# Altium PCB AutoReverseAVR.PcbDoc
Units mm, origin at the board's own origin, x right, y up, seen from the top; angles counter-clockwise.
Board outline 152.4 x 101.6 mm, 2 copper layers (Top Layer, Bottom Layer); 53 components, 50 nets, 179 pads, 39 vias.
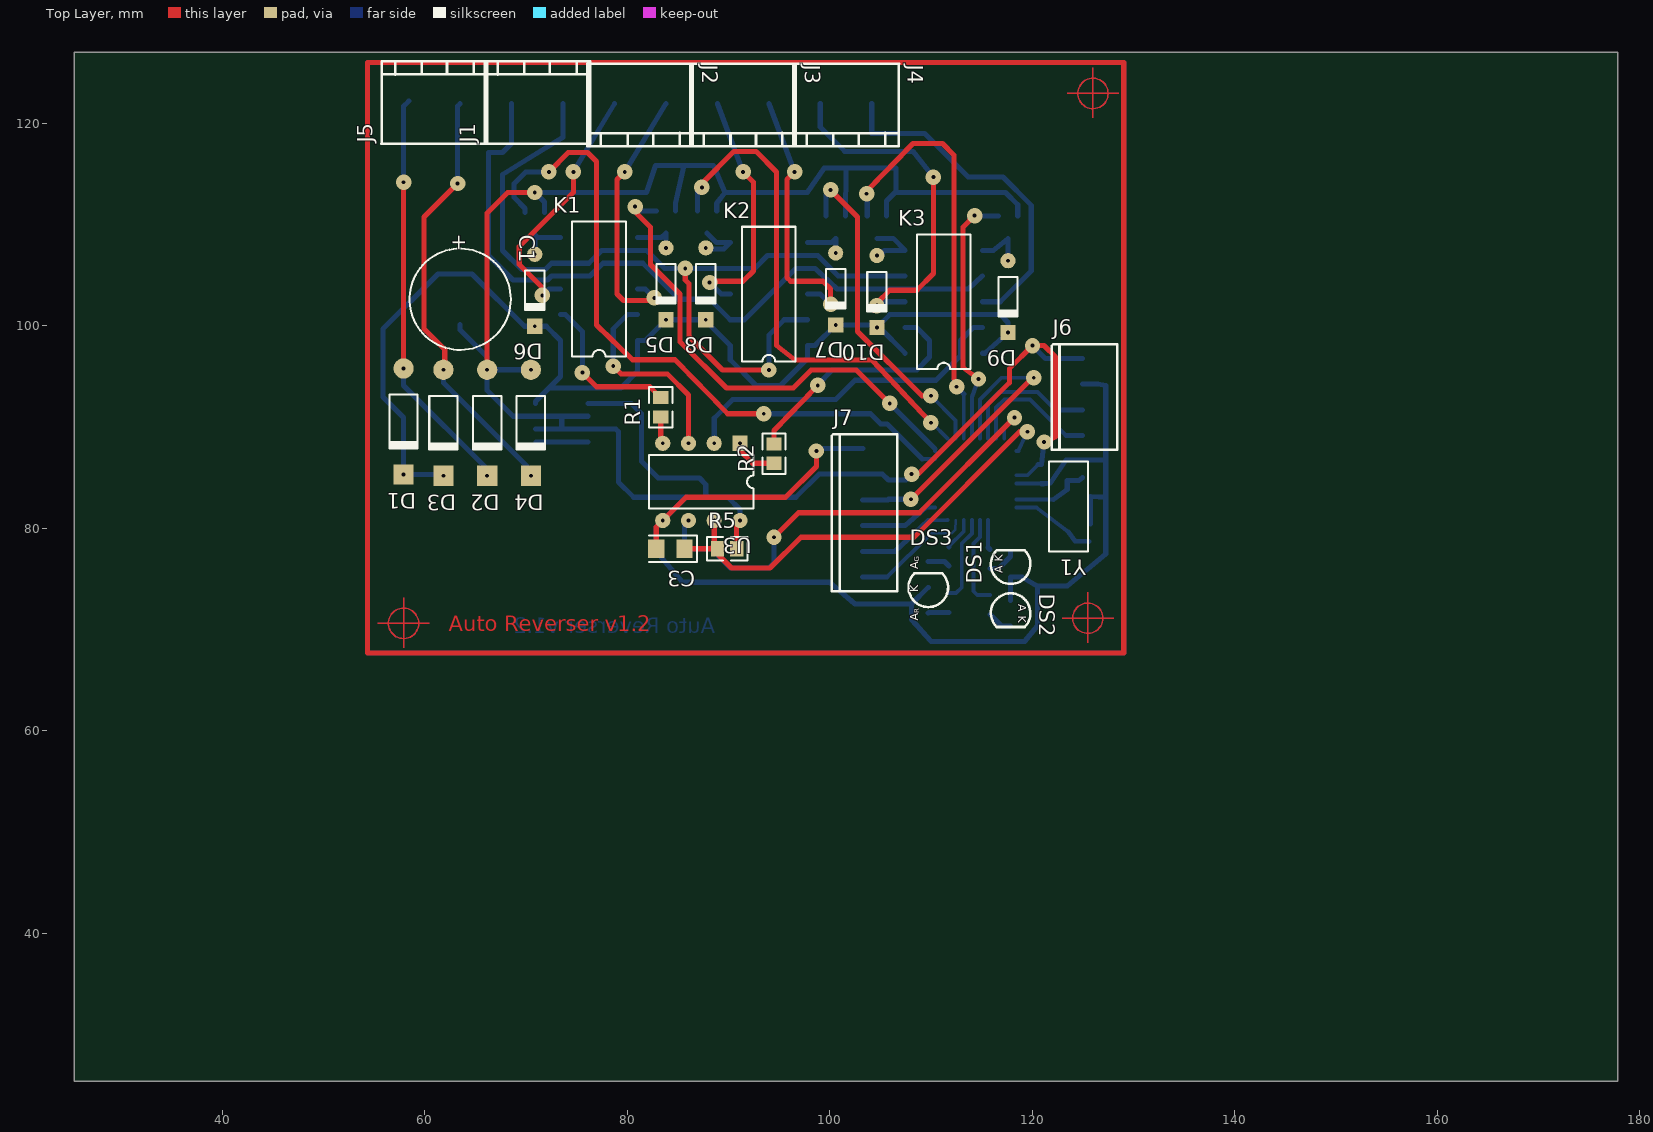
[diagram p0: Top Layer view]
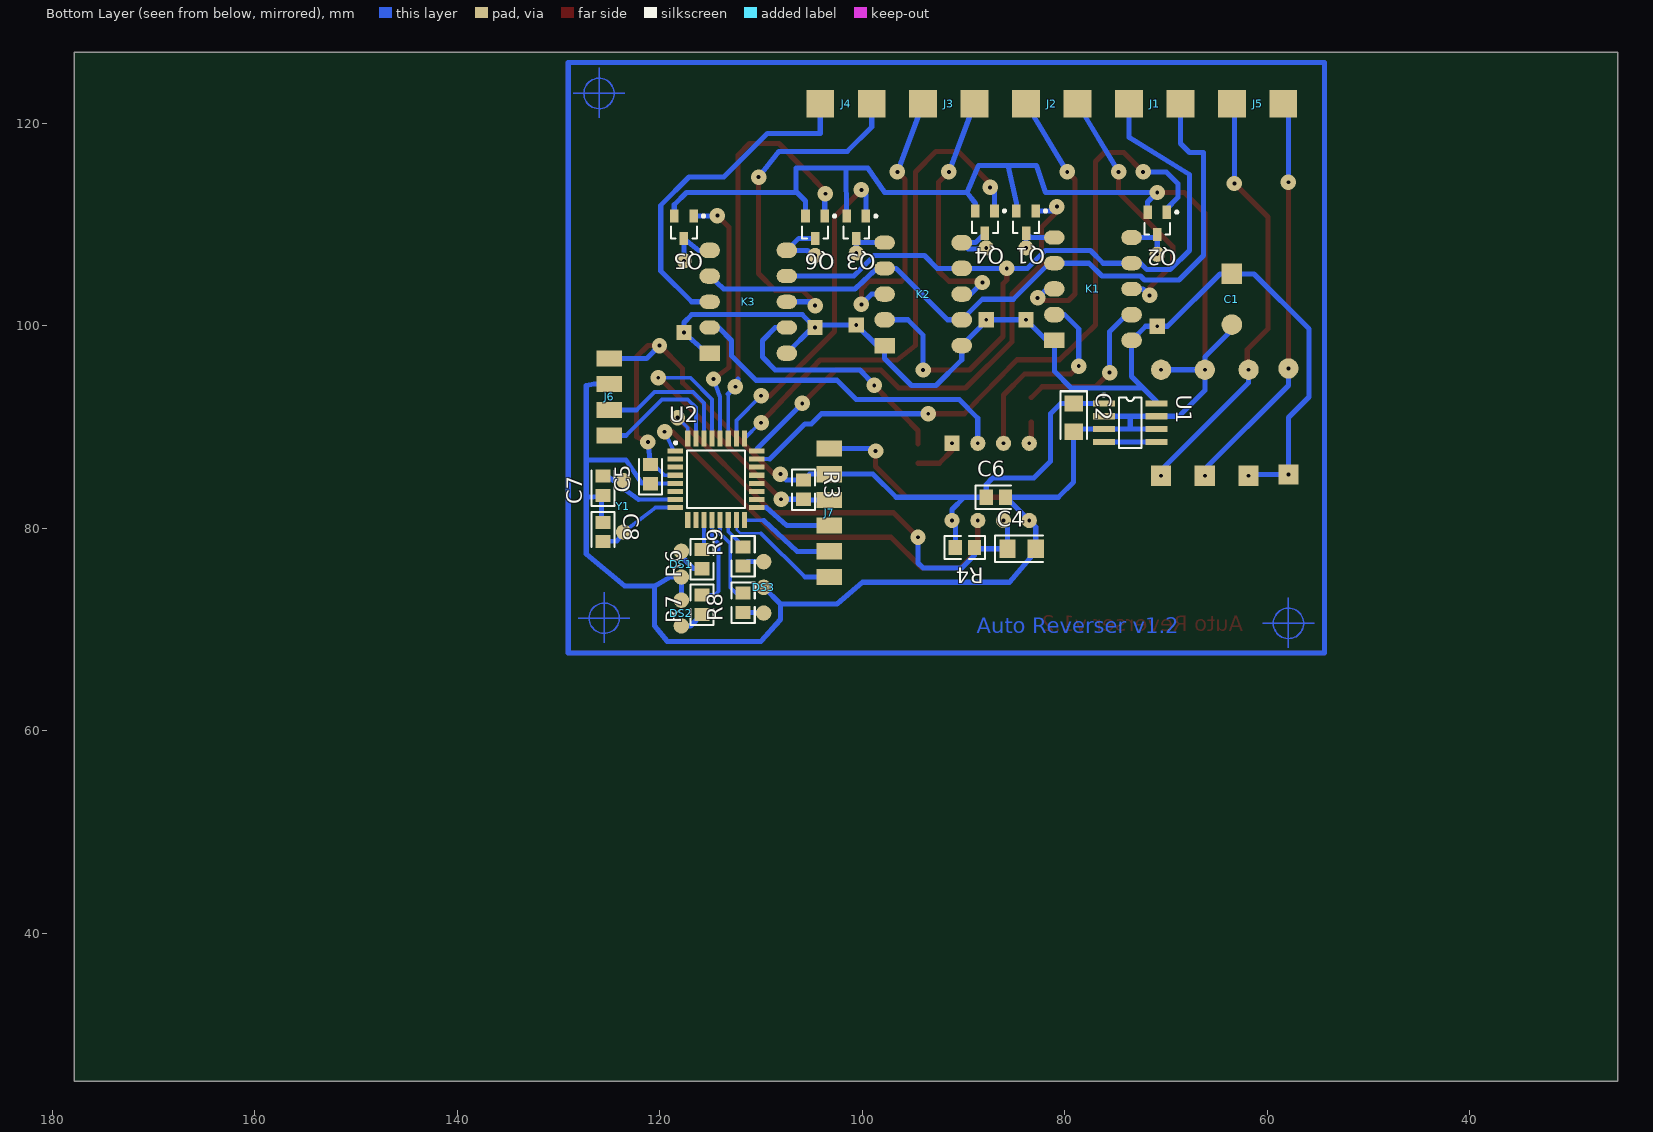
[diagram p1: Bottom Layer view, seen from below]

## Layer stack, top to bottom
Top Layer: signal copper 0.0356
Dielectric: dielectric 0.32, FR-4, Dk 4.8
Bottom Layer: signal copper 0.0356

## Board outline
25.4,25.4 177.8,25.4 177.8,127 25.4,127

## Design rules (kind name [scope] priority, off if disabled: settings)
Clearance [All] p1: gap=0.305
ComponentClearance [All] p1: gap=0.254 collisioncheckmode=1
PolygonConnect [All] p1: connectstyle=Relief reliefconductorwidth=0.254 reliefentries=4 polygonreliefangle="90 Angle"
RoutingLayers [All] p1: top layer=Horizontal bottom layer=Vertical
RoutingVias [All] p1: holewidth=0.381 width=1.524 viastyle="Through Hole" minholewidth=0.381 minwidth=1.524 maxholewidth=0.381 maxwidth=1.524
SolderMaskExpansion [All] p1: expansion=0.102
TestPointUsage [All] p1: valid=0 allowmultiple=FALSE
Testpoint [All] p1: side=15 testpointundercomponent=TRUE minsize=1.016 maxsize=2.54 preferedsize=1.524 minholesize=0 maxholesize=1.016 preferedholesize=0.813 testpointgrid=0.025 style=1023 order=1234567890
Width [All] p1: maxlimit=1.27 minlimit=0.254 preferedwidth=0.254
16 further rules are at their usual default settings.

## Classes and differential pairs
component class AutoReverseAVR: C1 C2 C3 C4 C5 C6 C7 C8 D1 D2 D3 D4 D5 D6 D7 D8 D9 D10 DS1 DS2 DS3 J1 J2 J3 J4 J5 J6 J7 K1 K2 K3 Q1 Q2 Q3 Q4 Q5 Q6 R1 R2 R3 R4 R5 R6 R7 R8 R9 U1 U2 U3 Y1

## Components (designator, comment, footprint, x,y, rotation, side; value= is the part's Value field where it differs from the comment)
C1 "Cap Pol1" CAPPR5-10X10.5 63.5,102.616 r270 top
C2 "10v" CC3216-1206 79.121,90.932 r270 bottom
C3 "Cap Pol1" CC3216-1206 84.267,77.978 r180 top
C4 "Cap Pol1" CC3216-1206 84.267,77.978 r180 bottom
C5 "Cap" CC2012-0805 120.904,85.344 r90 bottom
C6 "Cap" CC2012-0805 86.807,83.058 r180 bottom
C7 "Cap" CC2012-0805 125.603,84.201 r90 bottom
C8 "Cap" CC2012-0805 125.603,79.629 r270 bottom
D1 "Diode 1N4004" DIO10.46-5.3x2.8 57.912,90.551 r270 top
D2 "Diode 1N4004" DIO10.46-5.3x2.8 66.167,90.424 r270 top
D3 "Diode 1N4004" DIO10.46-5.3x2.8 61.849,90.424 r270 top
D4 "Diode 1N4004" DIO10.46-5.3x2.8 70.485,90.424 r270 top
D5 "Diode 1N4148" DIO7.1-3.9x1.9 83.82,104.14 r270 top
D6 "Diode 1N4148" DIO7.1-3.9x1.9 70.866,103.505 r270 top
D7 "Diode 1N4148" DIO7.1-3.9x1.9 100.584,103.632 r270 top
D8 "Diode 1N4148" DIO7.1-3.9x1.9 87.757,104.14 r270 top
D9 "Diode 1N4148" DIO7.1-3.9x1.9 117.602,102.87 r270 top
D10 "Diode 1N4148" DIO7.1-3.9x1.9 104.648,103.378 r270 top
DS1 "LED0" LED3mm 117.856,75.184 r90 top
DS2 "LED0" LED3mm 117.856,72.898 r270 top
DS3 "LED Tricolour" "LED3mm TriColour" 109.728,74.168 r90 top
J1 "Main Track" "Screw Terminal 2 way 0.2" 76.2,124.46 r90 top
J2 "West" "Screw Terminal 2 way 0.2" 76.2,119.38 r270 top
J3 "Center" "Screw Terminal 2 way 0.2" 86.36,119.38 r270 top
J4 "East" "Screw Terminal 2 way 0.2" 96.52,119.38 r270 top
J5 "12V AC" "Screw Terminal 2 way 0.2" 66.04,124.46 r90 top
J6 "RS232 CONNECTOR" "0.1 SIP 4 PIN" 127.508,91.694 r0 top
J7 "ISP Connector" "0.1 SIP 6 PIN" 105.791,82.804 r0 top
K1 "West Relay" DIP-10#1 77.216,103.632 r90 top
K2 "Reversing Relay" DIP-10#2 93.98,103.124 r90 top
K3 "East Relay" DIP-10#3 111.252,102.362 r90 top
Q1 "UN2212" SO-G3 83.82,110.236 r0 bottom
Q2 "UN2212" SO-G3 70.866,110.109 r0 bottom
Q3 "UN2212" SO-G3 100.584,109.728 r0 bottom
Q4 "UN2212" SO-G3 87.884,110.236 r0 bottom
Q5 "UN2212" SO-G3 117.602,109.728 r0 bottom
Q6 "UN2212" SO-G3 104.648,109.728 r0 bottom
R1 "Res2" CR2012-0805 83.312,91.948 r90 top
R2 "Res2" CR2012-0805 94.488,87.376 r90 top
R3 "Res2" CR2012-0805 105.791,83.82 r270 bottom
R4 "Res2" CR2012-0805 89.855,78.105 r0 bottom
R5 "Res2" CR2012-0805 89.855,77.978 r0 top
R6 "Res2" CR2012-0805 115.824,76.962 r90 bottom
R7 "Res2" CR2012-0805 115.824,72.451 r90 bottom
R8 "Res2" CR2012-0805 111.76,72.644 r90 bottom
R9 "Res2" CR2012-0805 111.76,77.216 r90 bottom
U1 "LM78L05ACM" M08A 73.533,90.424 r270 bottom
U2 "AT90LS4433-4AC" 32A 114.427,84.836 r180 bottom
U3 "HCPL-2530 Opto Coupler" 8P3 87.315,84.582 r180 top
Y1 "8MHz" RAD-0.2 123.571,82.169 r270 top
? "" Crosshair 57.912,70.612 r270 top
? "" Crosshair 125.476,71.12 r270 top
? "" Crosshair 125.984,122.936 r270 top

## Footprints (in the part's own frame and the unit in brackets; to place one, negate y for a bottom-side part, rotate by r counter-clockwise, add the part's x,y. Pads: shape width x height; smd on the part's side, far side on the other; paste and mask are expansions set on the pad)
"0.1 SIP 4 PIN" [mm] "0.1 SIP 4 PIN"
  rect 2.5x1.6 smd far side: 1(-2.54,5.08) 2(-2.54,2.54) 3(-2.54,0) 4(-2.54,-2.54)
  silkscreen extent -5.59,-3.94 0.89,6.48
"0.1 SIP 6 PIN" [mm] "0.1 SIP 6 PIN"
  rect 2.5x1.6 smd far side: 1(-2.54,5.08) 2(-2.54,2.54) 3(-2.54,0) 4(-2.54,-2.54) 5(-2.54,-5.08) 6(-2.54,-7.62)
  silkscreen extent -5.59,-9.02 0.89,6.48
8P3 [mm] "DIP; 8 Leads; Row Spacing 7.62 mm; Pitch 2.54 mm"
  rect 1.5x1.5 hole 0.381: 1(-3.81,-3.81)
  round 1.5 hole 0.381: 2(-1.27,-3.81) 3(1.27,-3.81) 4(3.81,-3.81) 5(3.81,3.81) 6(1.27,3.81) 7(-1.27,3.81) 8(-3.81,3.81)
  silkscreen extent -5.15,-2.65 5.15,2.65
32A [mm] "QFP; 32 Leads; Body 7 x 7 mm; Pitch 0.8 mm"
  rect 1.55x0.5 smd: 1(-4.025,2.8) 2(-4.025,2) 3(-4.025,1.2) 4(-4.025,0.4) 5(-4.025,-0.4) 6(-4.025,-1.2) 7(-4.025,-2) 8(-4.025,-2.8) 17(4.025,-2.8) 18(4.025,-2) 19(4.025,-1.2) 20(4.025,-0.4) 21(4.025,0.4) 22(4.025,1.2) 23(4.025,2) 24(4.025,2.8)
  rect 0.5x1.55 smd: 9(-2.8,-4.025) 10(-2,-4.025) 11(-1.2,-4.025) 12(-0.4,-4.025) 13(0.4,-4.025) 14(1.2,-4.025) 15(2,-4.025) 16(2.8,-4.025) 25(2.8,4.025) 26(2,4.025) 27(1.2,4.025) 28(0.4,4.025) 29(-0.4,4.025) 30(-1.2,4.025) 31(-2,4.025) 32(-2.8,4.025)
  silkscreen extent -4.13,-2.85 2.85,3.72
CAPPR5-10X10.5 [mil]
  rect 80x80 smd far side: 1(-98.43,0)
  round 80 smd far side: 2(98.43,0)
  silkscreen extent -197,-197 197,197
CC2012-0805 [mm]
  rect 1.3x1.5 smd: 1(-0.95,0) 2(0.95,0)
  silkscreen extent -2,-1.15 1.5,1.15
CC3216-1206 [mm]
  rect 1.6x1.8 smd: 1(-1.4,0) 2(1.4,0)
  silkscreen extent -2.6,-1.3 2.1,1.3
CR2012-0805 [mm]
  rect 1.3x1.5 smd: 1(-0.95,0) 2(0.95,0)
  silkscreen extent -2,-1.15 2,1.15
Crosshair [mm] "Mounting Hole pad"
  Multi-Layer circle w0.127: c0,0 r1.5
  Multi-Layer lines w0.127: 0,-2.54 0,2.54 ; 2.413,0 -2.54,0
DIO7.1-3.9x1.9 [mm]
  round 1.5 hole 0.381: 1(-3.55,0)
  rect 1.5x1.5 hole 0.381: 2(3.55,0)
  silkscreen extent -1.95,-0.95 2.05,0.95
DIO10.46-5.3x2.8 [mm]
  round 2 hole 0.381: 1(-5.23,0)
  rect 2x2 hole 0.381: 2(5.23,0)
  silkscreen extent -2.65,-1.4 2.75,1.4
DIP-10#1 [mil]
  rect 60x80 smd far side: 1(-200,-150)
  oval 60x80 smd far side: 2(-100,-150) 3(0,-150) 6(200,150) 9(-100,150) 10(-200,150)
  oval 55x80 smd far side: 4(100,-150) 5(200,-150) 7(100,150) 8(0,150)
  silkscreen extent -262,-104 262,104
DIP-10#2 [mil]
  rect 60x80 smd far side: 1(-200,-150)
  oval 60x80 smd far side: 2(-100,-150) 3(0,-150) 6(200,150) 7(100,150) 8(0,150) 9(-100,150) 10(-200,150)
  oval 55x80 smd far side: 4(100,-150) 5(200,-150)
  silkscreen extent -262,-104 262,104
DIP-10#3 [mil]
  rect 60x80 smd far side: 1(-200,-150)
  oval 55x80 smd far side: 2(-100,-150) 3(0,-150) 7(100,150) 8(0,150) 9(-100,150)
  oval 60x80 smd far side: 4(100,-150) 5(200,-150) 6(200,150) 10(-200,150)
  silkscreen extent -262,-104 262,104
LED3mm [mil] "LED 3mm Through Hole"
  round 60 smd far side: 1(100,0) 2(0,0)
  silkscreen extent -27,-77 104,77
"LED3mm TriColour" [mil]
  round 60 smd far side: 1(100,0) 2(0,0) 3(-100,0)
  silkscreen extent -77,-77 54,77
M08A [mm] "Small Outline; 8 Leads; Body Width 3.9 mm; Pitch 1.27 mm"
  rect 0.6x2.2 smd: 1(-1.905,-2.6) 2(-0.635,-2.6) 3(0.635,-2.6) 4(1.905,-2.6) 5(1.905,2.6) 6(0.635,2.6) 7(-0.635,2.6) 8(-1.905,2.6)
  silkscreen extent -2.88,-2.72 2.5,1.1
RAD-0.2 [mil]
  round 60 smd far side: 1(-100,0) 2(100,0)
  silkscreen extent -175,-75 175,75
"Screw Terminal 2 way 0.2" [mm]
  rect 2.75x2.75 smd far side: 1(-2.54,7.62) 2(-2.54,2.54)
  silkscreen extent -6.5,-0.15 1.65,10.31
SO-G3 [mm]
  rect 0.85x1.3 smd: 1(-0.95,-1.1) 2(0.95,-1.1) 3(0,1.1)
  silkscreen extent -2.05,-1.22 1.28,1.1

## Part data
C1 C3 C4: "Polarized Capacitor (Radial)"
C2: library part "Cap Pol1", "Polarized Capacitor (Radial)"
C5 C6 C7 C8: "Capacitor"
D1 D2 D3 D4: "1 Amp General Purpose Rectifier"
D5 D6 D7 D8 D9 D10: "High Conductance Fast Diode"
DS1 DS2: "Typical INFRARED GaAs LED"
DS3: "Typical Red Green Tri Color LED"
J1 J2 J3 J4 J5: library part "Screw Terminal 2 Way"
K1 K2 K3: library part "EA2-5T Dual Coil 5V Latching Relay", "EA2-5T Dual Coil 5V Latching Relay"
Q1 Q2 Q3 Q4 Q5 Q6: "Bias Resistor Transistor"
R1 R2 R3 R4 R5 R6 R7 R8 R9: "Resistor"
U1: "3-Terminal Positive Regulator"
U2: "8-Bit AVR Microcontroller with 4K Bytes of In-System Programmable Flash Memory"
U3: library part HCPL-2530
Y1: library part XTAL, "Crystal Oscillator"

## Via types
v1: diameter 1.524, hole 0.381, Top Layer to Bottom Layer, 39 vias

## Nets (pads, with @x,y where several pads share a name; then routed paths per layer and width w, separated by ;. In a path a pad name is that pad's centre, name@x,y a point inside that pad or via, vN(x,y) a via of type N, cw(c..) or ccw(c..) an arc to the next point about the centre after c; other vN are vias at no path point)
A: J1.2 K1.7 K2.2 K2.7 K3.7 | length 85.2
  Top Layer w0.508: v1(85.725,105.664) 85.725,104.521 86.106,104.14 86.106,98.933 89.408,95.631 v1(93.98,95.631)
  Bottom Layer w0.508: J1.2 73.66,118.618 67.691,114.935 67.691,107.442 69.596,105.537 71.882,105.537 72.517,106.172 76.2,106.172 77.47,107.442 81.915,107.442 83.693,105.664 92.583,105.664 93.853,106.934 98.806,106.934 100.838,104.902 K3.7 ; v1(93.98,95.631) 93.98,99.06 95.504,100.584 K2.2
B: J1.1 K1.4 K2.4 K2.9 K3.4 | length 72.9
  Bottom Layer w0.508: J1.1 68.58,117.983 67.691,117.094 66.294,117.094 66.294,106.934 68.707,104.521 72.136,104.521 72.517,104.902 76.327,104.902 77.597,106.172 81.534,106.172 85.09,102.616 88.138,102.616 K2.9 91.567,100.584 96.647,105.664 98.552,105.664 100.711,103.632 113.665,103.632 K3.4
GND: C1.2 C2.2 C3.2 C4.2 C5.1 C6.2 C7.1 C8.1 D2.1 D4.1 DS1.2 DS2.2 DS3.2 J6.2 J7.1 Q1.2 Q2.2 Q3.2 Q4.2 Q5.2 Q6.2 U1.2 U1.3 U1.6 U1.7 U2.5 U3.5 | length 269.2
  Top Layer w0.508: D2.1 66.167,111.125 68.199,113.157 v1(70.866,113.157) ; C3.2 82.867,80.134 85.791,83.058 95.631,83.058 98.679,86.106 v1(98.679,87.63)
  Bottom Layer w0.381: U2.5 C5.1@120.862,84.436
  Bottom Layer w0.508: C1.2 63.5,99.568 66.167,96.901 66.167,93.599 68.707,91.059 U1.2 ; D2.1 D4.1 ; U1.6 78.864,89.789 C2.2 79.121,84.582 80.645,83.058 C6.2 85.791,83.058 82.867,80.134 82.867,77.661 85.471,74.676 99.949,74.676 102.489,72.517 108.077,72.517 ; Q2.2 71.816,112.207 v1(70.866,113.157) 81.915,113.157 82.804,115.824 88.519,115.824 89.662,113.157 ; 73.533,89.789 73.533,91.059 ; Q1.2 84.77,112.075 85.598,115.824 ; Q4.2 88.834,112.08 89.662,113.157 ; v1(98.679,87.63) 98.933,87.884 J7.1 ; Q3.2 101.6,115.57 ; Q6.2 105.598,112.329 106.426,113.157 117.348,113.157 118.552,111.953 Q5.2 ; 105.598,112.334 106.553,113.284 106.553,115.57 99.441,115.57 97.79,113.157 89.662,113.157 ; DS3.2 108.077,72.517 ; DS2.2 DS1.2 118.999,75.184 120.523,74.295 ; C5.1@120.862,84.436 C5.1 121.097,84.394 121.793,84.455 123.317,86.741 126.238,86.741 127.254,86.741 ; J6.2 126.492,94.234 127.254,94.107 127.254,77.47 123.444,74.295 120.523,74.295 ; C8.1@125.73,80.452 125.73,83.124 127.254,83.058 ; 108.077,72.517 108.077,70.993 109.982,68.834 119.253,68.834 120.523,70.358 120.523,74.295
NetC3_1: C3.1 R5.1 U2.1 U3.7 | length 45.7
  Top Layer w0.508: C3.1 R5.1 88.905,77.465 90.297,76.073 94.107,76.073 97.155,79.121 108.331,79.121 118.745,89.535 v1(119.507,89.535) ; R5.1@88.265,77.978 88.585,78.298 U3.7
  Bottom Layer w0.381: U2.1 118.624,87.636 v1(119.507,89.535)
NetC4_1: C4.1 R4.1 U2.32 U3.6 | length 47
  Top Layer w0.508: v1(94.488,79.121) 96.901,81.534 108.839,81.534 v1(118.237,90.932)
  Bottom Layer w0.381: U2.32 117.227,89.922 v1(118.237,90.932)
  Bottom Layer w0.508: U3.6 85.667,80.394 C4.1 88.778,77.978 R4.1 88.905,77.338 90.17,76.073 93.98,76.073 94.488,76.581 v1(94.488,79.121)
NetC7_2: C7.2 U2.7 Y1.1 | length 7.8
  Bottom Layer w0.381: U2.7 122.079,82.836
  Bottom Layer w0.508: 122.079,82.836 123.444,83.82 123.444,84.709 124.587,84.709 C7.2@124.968,85.024
NetC8_2: C8.2 U2.8 Y1.2 | length 8.4
  Bottom Layer w0.381: U2.8 120.402,82.036 Y1.2
  Bottom Layer w0.508: Y1.2 124.206,78.74 C8.2
NetD1_1: D1.1 D2.2 J5.1 | length 40
  Top Layer w0.508: D1.1 v1(57.912,114.173)
  Bottom Layer w0.508: D1.1 57.912,94.107 D2.2@66.167,85.852 ; v1(57.912,114.173) 57.912,121.666 J5.1@58.42,122.174
NetD3_1: D3.1 D4.2 J5.2 | length 42
  Top Layer w0.508: D3.1@61.976,95.758 61.976,97.663 59.944,99.695 59.944,110.744 v1(63.246,114.046)
  Bottom Layer w0.508: D3.1 61.849,94.361 D4.2@70.485,85.725 ; v1(63.246,114.046) 63.246,121.666 J5.2
NetD5_1: D5.1 K1.5 Q1.3 | length 4.4
  Bottom Layer w0.508: K1.5 83.396,108.712 Q1.3 D5.1
NetD6_1: D6.1 K1.6 Q2.3 | length 4.6
  Bottom Layer w0.508: D6.1 Q2.3 71.163,108.712 K1.6
NetD7_1: D7.1 K2.5 Q3.3 | length 4.4
  Bottom Layer w0.508: K2.5 100.16,108.204 Q3.3 D7.1
NetD8_1: D8.1 K2.6 Q4.3 | length 5.1
  Bottom Layer w0.508: Q4.3 88.816,108.204 K2.6 89.529,107.563 D8.1@88.011,107.563
NetD9_1: D9.1 K3.5 Q5.3 | length 5.2
  Bottom Layer w0.508: K3.5 116.162,107.442 Q5.3 D9.1
NetD10_1: D10.1 K3.6 Q6.3 | length 6
  Bottom Layer w0.508: Q6.3 106.256,108.628 K3.6 105.41,107.442 D10.1@104.902,106.934
NetDS1_1: DS1.1 R6.1 | length 3
  Bottom Layer w0.508: R6.1 116.652,76.012 117.856,77.216 DS1.1
NetDS2_1: DS2.1 R7.1 | length 2.5
  Bottom Layer w0.508: R7.1 116.967,70.358 DS2.1
NetDS3_1: DS3.1 R9.1 | length 2.2
  Bottom Layer w0.508: DS3.1 111.318,76.708 R9.1
NetDS3_3: DS3.3 R8.1 | length 2.1
  Bottom Layer w0.508: DS3.3 109.794,71.694 R8.1
NetJ2_1: J2.1 K1.3 | length 26.3
  Top Layer w0.508: v1(79.756,115.189) 78.994,114.427 78.994,103.124 79.629,102.489 82.423,102.489 v1(82.677,102.743)
  Bottom Layer w0.508: v1(79.756,115.189) J2.1 ; K1.3 81.788,103.632 v1(82.677,102.743)
NetJ2_2: J2.2 K1.8 | length 25.3
  Top Layer w0.508: v1(71.628,102.997) 71.628,103.759 69.342,106.045 69.342,107.823 74.676,113.157 v1(74.676,115.189)
  Bottom Layer w0.508: v1(71.628,102.997) 72.263,103.632 K1.8 ; v1(74.676,115.189) J2.2
NetJ3_1: J3.1 K2.3 | length 26.9
  Top Layer w0.508: v1(96.52,115.189) 95.758,114.427 95.758,104.775 96.139,104.394 99.314,104.394 100.076,103.632 v1(100.076,102.108)
  Bottom Layer w0.508: J3.1 v1(96.52,115.189) ; K2.3 99.06,103.124 v1(100.076,102.108)
NetJ3_2: J3.2 K2.8 | length 24.7
  Top Layer w0.508: v1(88.138,104.267) 88.265,104.394 91.44,104.394 92.456,105.41 92.456,114.173 v1(91.44,115.189)
  Bottom Layer w0.508: v1(88.138,104.267) 89.281,103.124 K2.8 ; J3.2 v1(91.44,115.189)
NetJ4_1: J4.1 K3.3 | length 34.2
  Bottom Layer w0.508: J4.1 104.14,118.999 109.347,118.999 113.665,114.681 117.094,114.681 119.888,111.887 119.888,105.41 116.84,102.362 K3.3
NetJ4_2: J4.2 K3.8 | length 35.2
  Top Layer w0.508: v1(104.648,101.981) 104.648,102.235 105.918,103.505 108.585,103.505 110.236,105.156 v1(110.236,114.681)
  Bottom Layer w0.508: J4.2 99.06,119.634 101.473,117.221 108.204,117.221 v1(110.236,114.681) ; v1(104.648,101.981) 105.029,102.362 K3.8
NetJ6_3: J6.3 U2.30 | length 14.1
  Bottom Layer w0.381: U2.30 115.627,92.386 116.713,93.472 120.523,93.472 122.301,91.694
  Bottom Layer w0.508: 122.301,91.694 J6.3
NetJ6_4: J6.4 U2.31 | length 13.4
  Bottom Layer w0.381: U2.31 116.427,91.916 117.221,92.71 119.761,92.71 123.317,89.154
  Bottom Layer w0.508: 123.317,89.154 J6.4
NetJ7_3: J7.3 R3.2 U2.29 | length 32
  Top Layer w0.508: v1(108.011,82.87) 120.01,94.869 v1(120.142,94.869)
  Bottom Layer w0.381: U2.29 114.827,92.729 116.967,94.869 v1(120.142,94.869)
  Bottom Layer w0.508: J7.3 105.725,82.804 R3.2 v1(108.011,82.87)
NetJ7_4: J7.4 U2.17 | length 7.8
  Bottom Layer w0.381: 109.474,82.042 U2.17
  Bottom Layer w0.508: J7.4 107.442,80.264 109.474,82.042
NetJ7_5: J7.5 U2.16 | length 9.6
  Bottom Layer w0.381: 109.728,80.772 U2.16
  Bottom Layer w0.508: J7.5 106.426,77.724 109.728,80.772
NetJ7_6: J7.6 U2.15 | length 12
  Bottom Layer w0.254: 109.982,79.502 112.014,79.502 112.395,79.883 U2.15
  Bottom Layer w0.381: 105.664,75.184 109.982,79.502
  Bottom Layer w0.508: J7.6 105.664,75.184
NetK1_2: K1.2 U3.3 | length 20.1
  Top Layer w0.508: v1(78.613,96.012) 79.375,95.25 83.947,95.25 86.045,93.152 U3.3
  Bottom Layer w0.508: v1(78.613,96.012) 78.613,99.695 80.01,101.092 K1.2
NetK1_9: K1.9 R1.2 | length 15.7
  Top Layer w0.508: v1(75.565,95.377) 76.962,93.98 82.23,93.98 R1.2
  Bottom Layer w0.508: K1.9 73.914,101.092 75.565,99.441 v1(75.565,95.377)
NetK3_2: K3.2 U3.2 | length 33.6
  Bottom Layer w0.508: U3.2 88.585,90.871 90.424,92.71 100.584,92.71 102.489,94.615 110.49,94.615 112.903,97.028 112.903,98.552 114.173,99.822 K3.2
NetK3_9: K3.9 R2.2 | length 24.4
  Top Layer w0.508: R2.2 94.488,89.662 v1(98.806,94.107)
  Bottom Layer w0.508: v1(98.806,94.107) 100.203,95.631 108.585,95.631 109.855,96.901 109.855,98.552 108.585,99.822 K3.9
NetQ1_1: Q1.1 U2.24 | length 48.7
  Top Layer w0.508: v1(80.772,111.76) 80.772,111.252 82.296,109.728 82.296,106.045 85.217,103.124 85.217,98.425 89.789,93.853 96.393,93.853 98.171,95.631 102.616,95.631 v1(105.918,92.329)
  Bottom Layer w0.381: U2.24 U2.24@110.402,87.845
  Bottom Layer w0.508: v1(80.772,111.76) 81.196,111.336 Q1.1 ; v1(105.918,92.329) U2.24@110.402,87.845
NetQ2_1: Q2.1 U2.23 | length 68.1
  Top Layer w0.508: v1(72.263,115.189) 74.168,117.094 76.073,117.094 76.962,116.205 76.962,100.076 80.518,96.647 84.709,96.647 89.916,91.313 v1(93.472,91.313)
  Bottom Layer w0.381: 109.125,86.836 U2.23
  Bottom Layer w0.508: Q2.1 69.916,111.567 68.834,112.649 68.834,114.046 69.977,115.189 v1(72.263,115.189) ; v1(93.472,91.313) 104.013,91.313 105.029,90.297 105.664,90.297 109.125,86.836
NetQ3_1: Q3.1 U2.26 | length 33
  Top Layer w0.508: v1(100.076,113.411) 102.743,110.744 102.743,99.441 109.093,93.091 v1(109.982,93.091)
  Bottom Layer w0.381: v1(109.982,93.091) 112.427,90.646 U2.26
  Bottom Layer w0.508: Q3.1 99.634,112.969 v1(100.076,113.411)
NetQ4_1: Q4.1 U2.25 | length 50.3
  Top Layer w0.508: v1(87.376,113.665) 87.376,114.046 90.551,117.221 92.71,117.221 94.742,115.189 94.742,98.044 96.559,96.608 104.179,96.608 v1(109.982,90.424)
  Bottom Layer w0.381: v1@110.064,90.424 U2.25
  Bottom Layer w0.508: Q4.1 86.934,113.223 v1(87.376,113.665) ; v1(109.982,90.424) v1@110.064,90.424
NetQ5_1: Q5.1 U2.28 | length 28.9
  Top Layer w0.508: v1(114.3,110.871) 113.157,109.728 113.157,95.885 v1(114.681,94.742)
  Bottom Layer w0.381: 114.027,92.036 U2.28 114.046,92.964 v1(114.681,94.742)
  Bottom Layer w0.508: v1(114.3,110.871) 114.343,110.828 Q5.1
NetQ6_1: Q6.1 U2.27 | length 41.9
  Top Layer w0.508: v1(103.632,113.03) 103.632,113.284 108.204,117.983 111.125,117.983 112.268,116.84 112.268,94.742
  Bottom Layer w0.381: U2.27 113.227,93.275
  Bottom Layer w0.508: v1(103.632,113.03) 103.698,112.207 Q6.1 ; 112.268,94.742 112.268,94.234 113.227,93.275
  other v1: 112.52,93.982
NetR1_1: R1.1 U3.4 | length 2.2
  Top Layer w0.508: R1.1@83.312,90.49 83.312,88.585 U3.4
NetR2_1: R2.1 U3.1 | length 4.6
  Top Layer w0.508: U3.1 91.125,87.691 92.39,86.426 R2.1
NetR6_2: R6.2 U2.11 | length 3
  Bottom Layer w0.381: R6.2@115.627,78.109 U2.11
  Bottom Layer w0.508: R6.2@115.627,78.109 R6.2
NetR7_2: R7.2 U2.12 | length 9.1
  Bottom Layer w0.381: U2.12 114.827,79.14 114.173,78.486 114.173,73.787 114.559,73.401 R7.2
NetR8_2: R8.2 U2.13 | length 8.6
  Bottom Layer w0.381: R8.2 112.456,73.594 113.03,74.168 113.03,78.486 114.027,79.483 U2.13
NetR9_2: R9.2 U2.14 | length 3.3
  Bottom Layer w0.381: R9.2@111.76,78.232 113.227,79.699 U2.14
  Bottom Layer w0.508: R9.2 R9.2@111.76,78.232
NetU1_4: U1.4 U1.5 | length 5.1
  Bottom Layer w0.508: U1.5@70.993,88.519 U1.4
VCC: C2.1 C5.2 C6.1 J6.1 J7.2 R3.1 R4.2 R5.2 U1.1 U2.4 U3.8 | length 89.5
  Top Layer w0.508: R5.2 90.805,80.452 U3.8 ; v1(108.077,85.344) 108.712,85.344 117.729,94.361 117.729,95.758 v1(120.015,98.044) 121.158,98.044 122.301,96.901 122.301,89.027 v1(121.158,88.519)
  Bottom Layer w0.381: U2.4 119.526,85.236 C5.2@120.584,86.294
  Bottom Layer w0.508: U1.1 80.391,92.329 81.407,91.313 81.407,86.614 83.058,84.963 87.122,84.963 87.757,84.328 C6.1 ; C2.1@79.118,92.329 C2.1 ; C6.1@88.011,83.058 96.647,83.058 98.933,85.344 J7.2 105.217,85.344 R3.1 107.503,84.77 v1(108.077,85.344) ; 89.916,83.058 91.125,81.849 U3.8 90.805,80.452 R4.2 ; v1(120.015,98.044) 121.285,96.774 J6.1 ; C5.2@120.584,86.294 C5.2 v1(121.158,88.519)
VDD: C1.1 D1.2 D3.2 D5.2 D6.2 D7.2 D8.2 D9.2 D10.2 K1.1 K1.10 K2.1 K2.10 K3.1 K3.10 U1.8 | length 114.7
  Bottom Layer w0.508: D3.2 61.722,85.321 D1.2 57.912,90.932 55.88,92.964 55.88,99.695 61.301,105.116 64.683,105.116 69.844,99.955 72.003,99.955 K1.10 73.406,94.996 70.933,92.523 U1.8 ; 72.39,93.853 79.375,93.853 81.026,95.504 K1.1 81.782,98.552 D5.2 D8.2 88.011,100.463 88.011,100.203 K2.10 90.17,96.647 92.71,94.107 95.123,94.107 97.79,96.774 K2.1 98.546,98.044 D7.2 104.394,100.082 D10.2 ; K3.10 104.896,99.828 D10.2 ; K3.1 115.31,97.282 D9.2 117.602,100.33 116.84,101.092 105.912,101.092 D10.2
pads on no net: U2.2 U2.3 U2.6 U2.9 U2.10 U2.18 U2.19 U2.20 U2.21 U2.22

## Other copper
Top Layer:
  text "Auto Reverser v1.2" at 62.357,69.85 h1.52
Bottom Layer:
  text "Auto Reverser v1.2" at 88.714,69.647 h1.52
Multi-Layer:
  lines w0.508: 54.356,67.691 54.356,125.984 129.032,125.984 129.032,67.691 54.356,67.691

## Text inside footprints (layer, text, board x,y; h text height)
C1: Top Overlay "+" at 62.75,109.091 h1.5 r270
DS1: Top Overlay "A" at 117.094,75.565 h0.8 r90; Top Overlay "K" at 117.094,76.708 h0.8 r90
DS2: Top Overlay "A" at 118.618,72.517 h0.8 r270; Top Overlay "K" at 118.618,71.374 h0.8 r270
DS3: Top Overlay "A" at 108.712,75.946 h0.8 r90; Top Overlay "R" at 108.839,71.628 h0.52 r90; Top Overlay "G" at 108.839,76.708 h0.52 r90; Top Overlay "K" at 108.712,73.66 h0.8 r90; Top Overlay "A" at 108.712,70.866 h0.8 r90